# EAGLE board sensor2 (EAGLE 9.4.2)
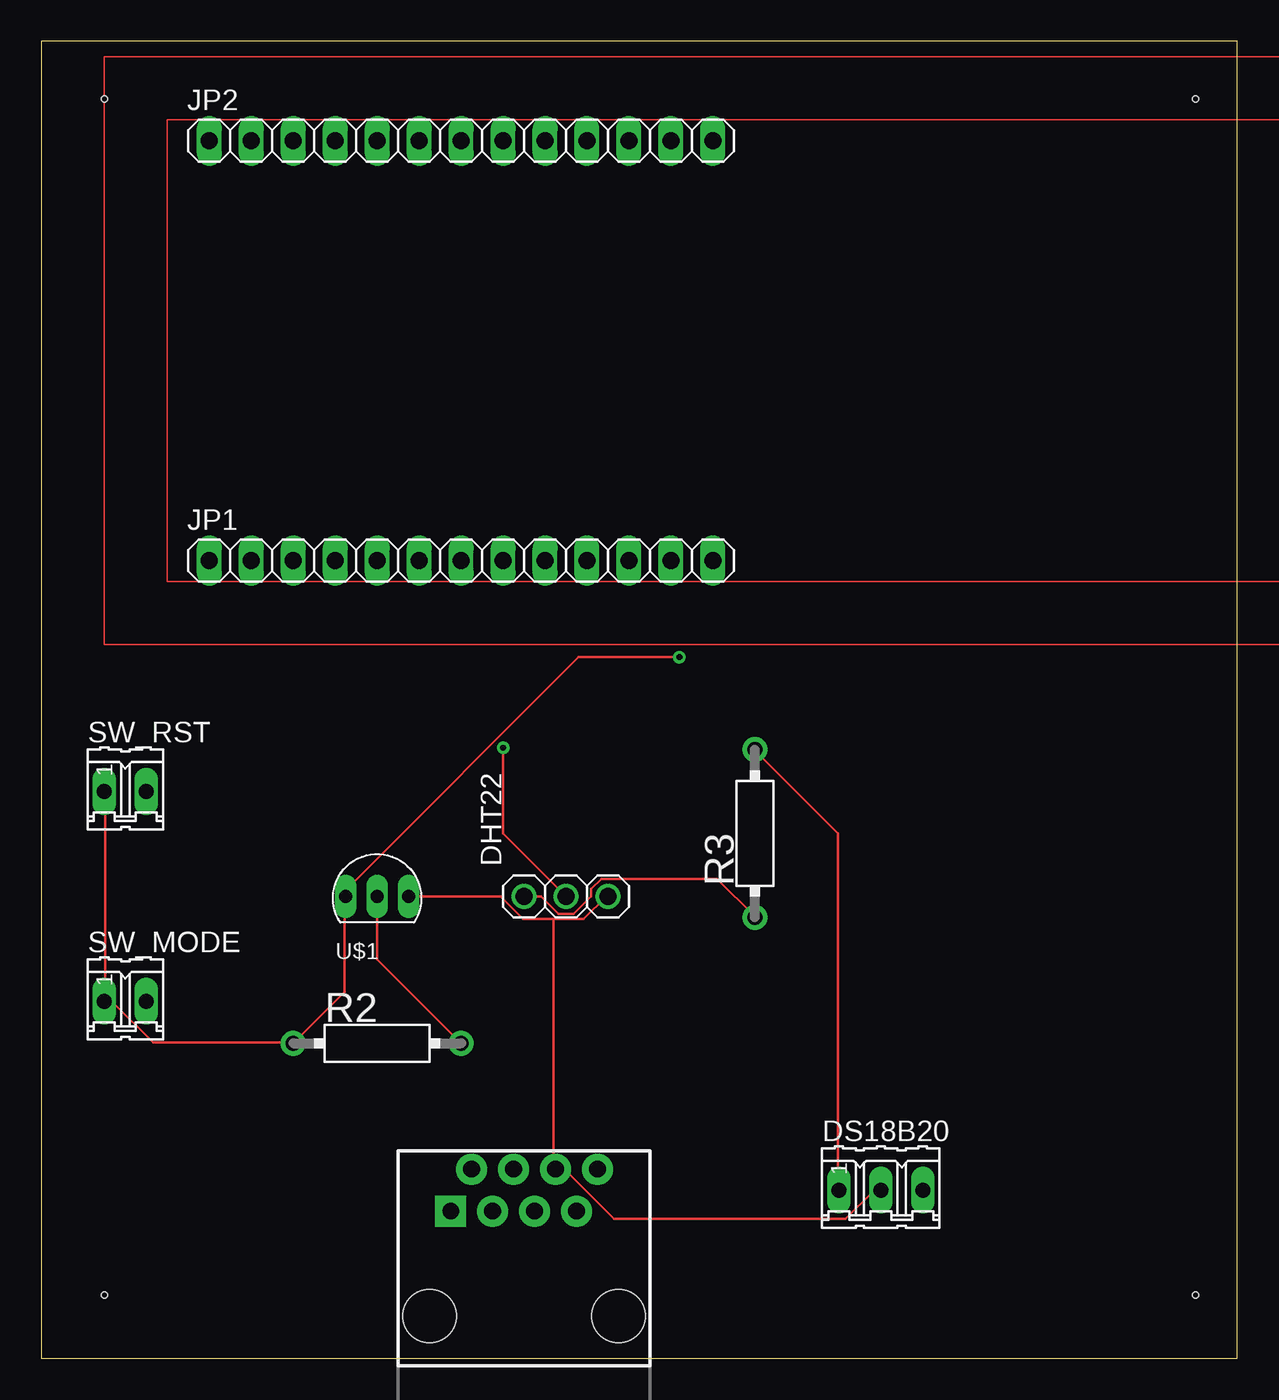
[diagram p0: board, top side]
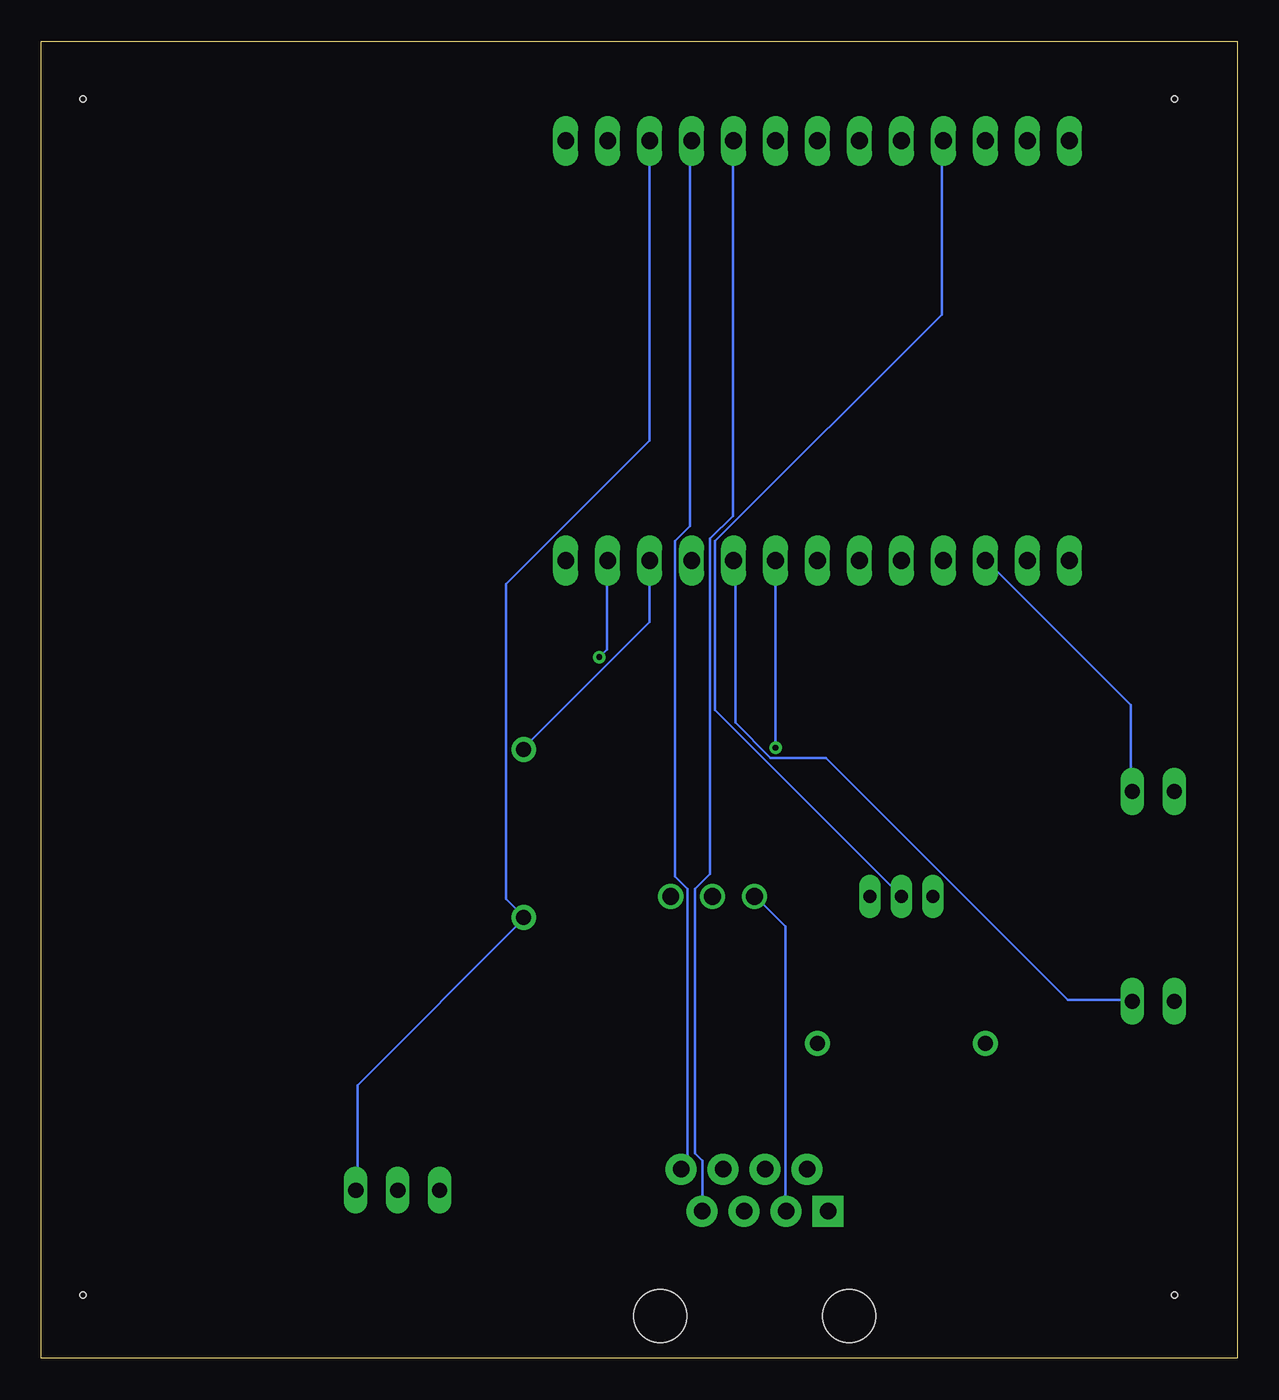
[diagram p1: board, bottom side, seen from below]

Size 72.37 x 79.68 mm. Coordinates in mm from the lower left corner, seen from the top.
Outline: 0,0 72.37,0 72.37,79.68 0,79.68 0,0
Copper layers (1*16): Top 0.035mm / dielectric 1.5mm / Bottom 0.035mm
Design rules "default": minimum track width 6mil, minimum drill 0.35mm, track to track 6mil, track to pad 6mil, pad to pad 6mil, via to via 6mil, smd to smd 6mil, copper to edge 40mil, drill to drill 6mil, minimum pad ring 10mil, minimum via ring 8mil, stop-mask expansion 4mil, vias tented up to drill 0mil, thermal gap 10mil
Holes 0.35 mm at 3.81,3.81 69.85,3.81 69.85,76.2 3.81,76.2

## Footprints (pad centres in the part's own frame; a part is rotated, then mirrored left to right if it is on the bottom)
1X03 = drill 1.016: 1 -2.54,0; 2 0,0; 3 2.54,0
03P = drill 0.914 long: 1 -2.54,0; 2 0,0; 3 2.54,0
RJ45-8 = drill 1 pad 1.88 square: 1 -4.445,6.35 | drill 1 pad 1.88: 2 -3.175,8.89; 3 -1.905,6.35; 4 -0.635,8.89; 5 0.635,6.35; 6 1.905,8.89; 7 3.175,6.35; 8 4.445,8.89 | hole 3.2: -5.715,0; 5.715,0
1X13 = drill 1.016 long: 1 -15.24,0; 2 -12.7,0; 3 -10.16,0; 4 -7.62,0; 5 -5.08,0; 6 -2.54,0; 7 0,0; 8 2.54,0; 9 5.08,0; 10 7.62,0; 11 10.16,0; 12 12.7,0; 13 15.24,0
HPS58 = drill 0.9 pad 1.5: 1 -5.08,0; 2 5.08,0
02P = drill 0.914 long: 1 -1.27,0; 2 1.27,0
TO92 = drill 0.8 pad 1.27 long: B 0,0; C 0,-1.905; E 0,1.905

## Placement (x,y rotation side)
DHT22  DHT22  [1X03]  31.75,27.94 0 top
DS18B20  DS18B20  [03P]  50.8,10.16 0 top
J1  RJ45  [RJ45-8]  29.21,2.54 0 top
JP1  JP1  [1X13]  25.4,48.26 0 top
JP2  JP2  [1X13]  25.4,73.66 0 top
R2  2K  [HPS58]  20.32,19.05 0 top
R3  4.7K  [HPS58]  43.18,31.75 90 top
SW_MODE  SW1  [02P]  5.08,21.59 0 top
SW_RST  SW2  [02P]  5.08,34.29 0 top
U$1  2N7000  [TO92]  20.32,27.94 270 top

## Library data of the parts
DHT22 JP1 JP2 = adafruit
DS18B20 SW_MODE SW_RST = con-amp-quick; OC_FARNELL: unknown; OC_NEWARK: unknown
J1 = SparkFun-Connectors; PROD_ID: CONN-08506; SF_ID: PRT-00643
R2 R3 = resistor-power; OC_FARNELL: unknown; OC_NEWARK: unknown
U$1 = 2N7000; AVAILABILITY: Unavailable; DESCRIPTION: MOSFETs- Power and Small Signal 60V 200mA N-Channel No-Cancel/No-Return; MF: STMicroelectronics; MP: 2N7000; PACKAGE: TO-92 ON Semiconductor; PRICE: None

## Nets
1WIRE: DS18B20.1 JP1.11 R3.2
3.3V: DHT22.1 DS18B20.3 J1.3 JP2.11 R3.1
DATA_T: DHT22.2 JP1.8
GND: JP1.12 R2.1 SW_MODE.1 SW_RST.1 U$1.C
MODE: JP1.9 SW_MODE.2
N$7: JP2.4 R2.2 U$1.B
RST: JP1.3 SW_RST.2
SCL: J1.7 JP2.9
SDA: J1.8 JP2.10
SENS_GND: DHT22.3 DS18B20.2 J1.6 U$1.E

## Tracks (layer width: path | path; a pad name or v marks a point on that pad's centre or on a via)
1WIRE
  Top 0.152: DS18B20.1 48.21,10.26 48.21,31.75 43.18,36.78 R3.2
  Bottom 0.152: JP1.11 35.56,44.55 43.18,36.93 R3.2
3.3V
  Top 0.152: DHT22.1 30.23,27.94 31.29,26.87 32.21,26.87 33.27,27.94 33.27,28.4 33.88,29.01 40.89,29.01 43.18,26.72 R3.1
  Bottom 0.152: DS18B20.3 53.24,10.26 53.24,16.51 43.18,26.57 R3.1 43.18,26.72 44.25,27.79 44.25,46.84 35.56,55.52 JP2.11 | J1.3 27.33,8.89 27.33,26.11 29.16,27.94 DHT22.1
DATA_T  (via drill 0.35)
  Top 0.152: v27.94,36.93 27.94,31.75 DHT22.2
  Bottom 0.152: v27.94,36.93 JP1.8
GND  (via drill 0.35)
  Top 0.152: SW_RST.1 3.86,34.19 3.86,21.69 SW_MODE.1 3.86,21.54 4.32,21.54 6.76,19.1 15.14,19.1 R2.1 18.34,22.15 18.34,27.94 U$1.C 18.49,27.94 18.49,28.4 32.51,42.42 v38.61,42.42
  Bottom 0.152: v38.61,42.42 38.15,42.88 38.15,48.21 JP1.12
MODE
  Bottom 0.152: SW_MODE.2 6.45,21.69 10.26,21.69 24.89,36.32 28.24,36.32 30.38,38.46 30.38,48.21 JP1.9
N$7
  Top 0.152: U$1.B 20.32,24.13 R2.2
  Bottom 0.152: U$1.B 31.6,39.22 31.6,49.43 17.88,63.14 17.88,73.66 JP2.4
RST
  Bottom 0.152: SW_RST.2 6.45,34.34 6.45,39.52 15.14,48.21 JP1.3
SCL
  Bottom 0.152: JP2.9 30.53,73.66 30.53,50.95 31.9,49.58 31.9,29.31 32.82,28.4 32.82,12.39 32.36,11.94 32.36,8.89 J1.7
SDA
  Bottom 0.152: JP2.10 33.12,73.66 33.12,50.34 34.04,49.43 34.04,29.16 33.27,28.4 33.27,11.79 33.58,11.48 J1.8
SENS_GND
  Top 0.152: U$1.E 27.79,27.94 29.16,26.57 30.99,26.57 | 30.99,26.57 32.82,26.57 34.19,27.94 DHT22.3 | DS18B20.2 50.8,10.11 50.34,10.11 48.67,8.43 34.65,8.43 31.75,11.33 31.14,11.33 J1.6 30.99,11.48 30.99,26.57
(copper drawn outside any net)
  shapes: Top area x1